# EAGLE board PSPS_AVNC_MITCH_2021-02-22 (EAGLE 9.6.2)
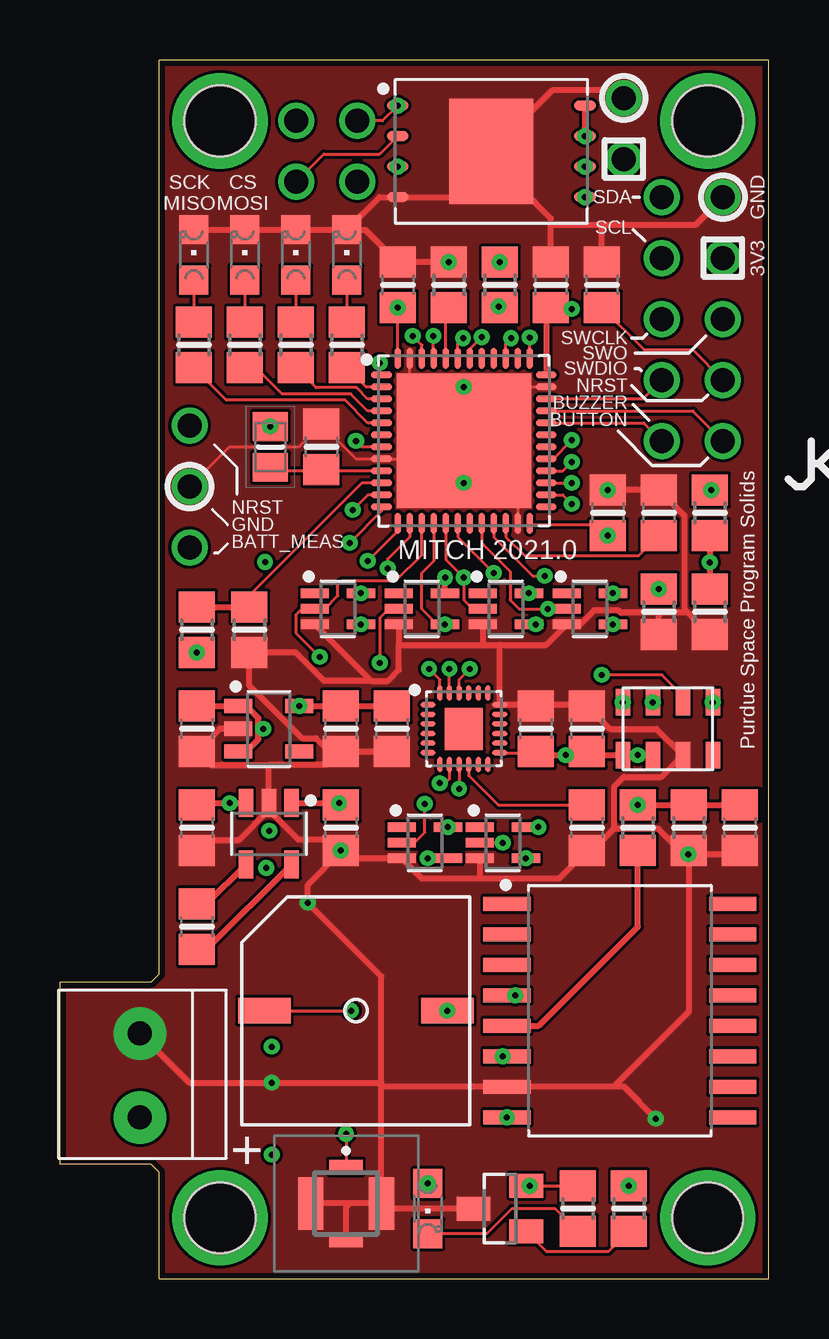
[diagram p0: board, top side]
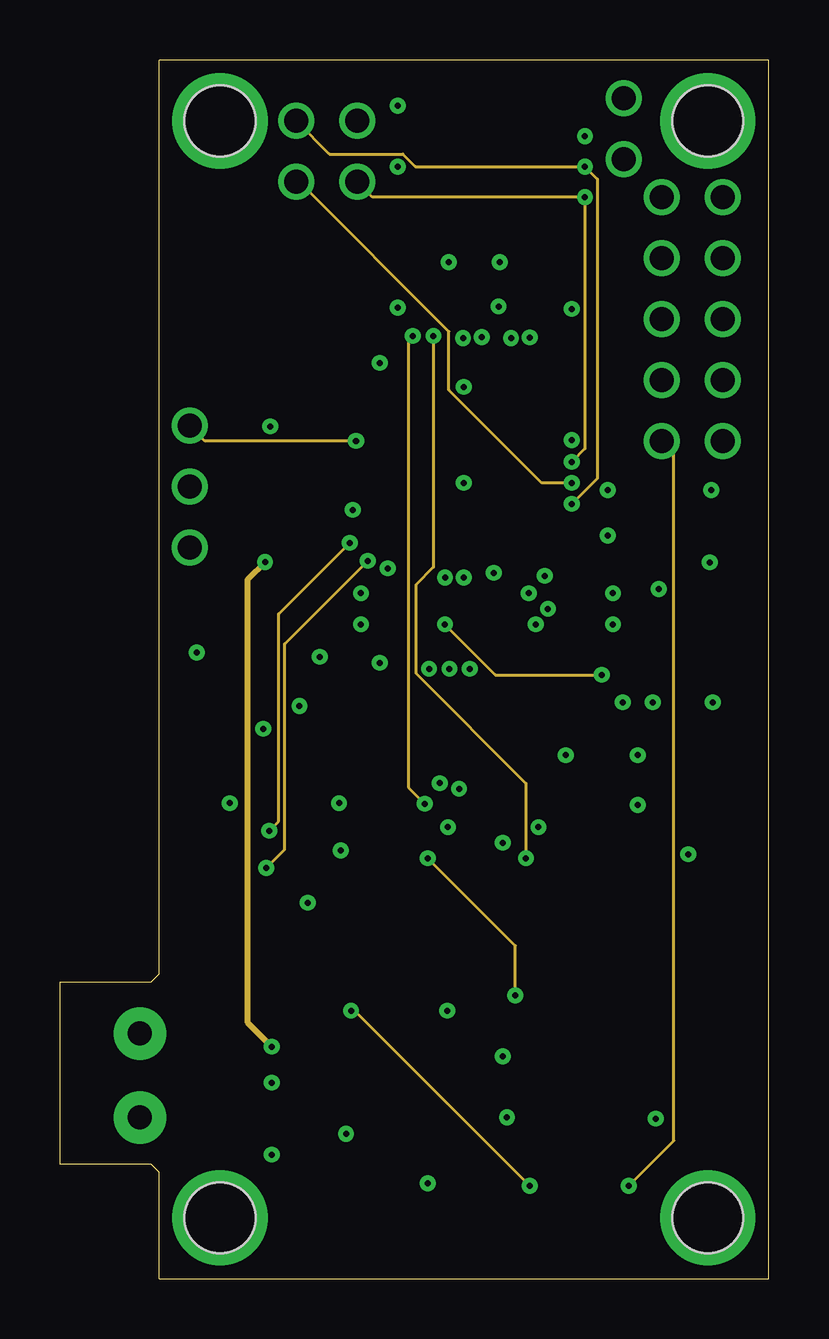
[diagram p1: board, inner layer Route2]
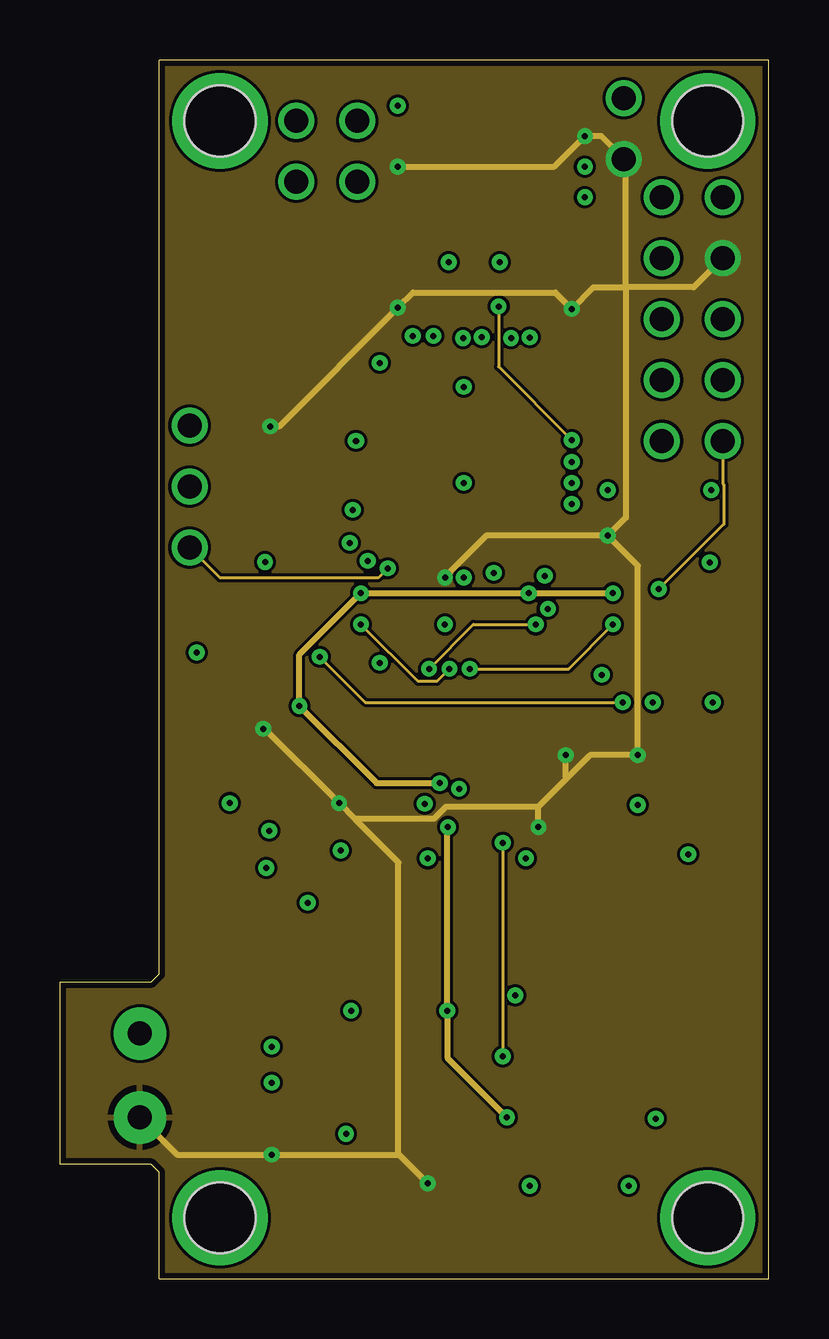
[diagram p2: board, inner layer Route15]
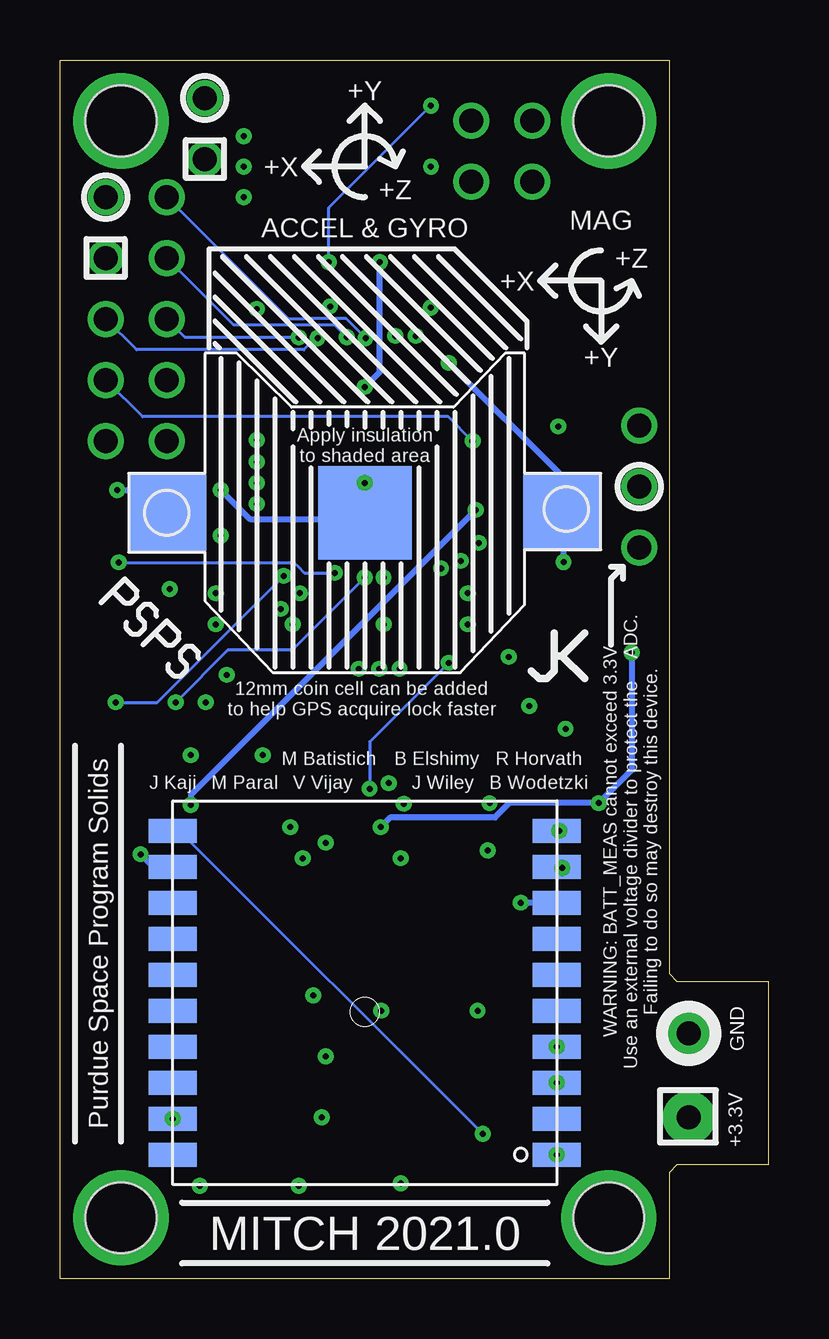
[diagram p3: board, bottom side, seen from below]

Size 29.53 x 50.8 mm. Coordinates in mm from the lower left corner, seen from the top.
Outline: 4.13,0 29.53,0 29.53,50.8 4.13,50.8 4.13,12.7 3.81,12.38 0,12.38 0,4.76 3.81,4.76 4.13,4.44 4.13,0
Copper layers (1+2*15+16): Top 0.035mm / dielectric 1.5mm / Route2 0.035mm / dielectric 0.15mm / Route15 0.035mm / dielectric 0.2mm / Bottom 0.035mm
Design rules "default *": minimum track width 5mil, minimum drill 0.25mm, track to track 5mil, track to pad 5mil, pad to pad 5mil, via to via 5mil, smd to smd 5mil, copper to edge 10mil, drill to drill 5mil, minimum pad ring 10mil, minimum via ring 8mil, stop-mask expansion 4mil, vias tented up to drill 0mil, thermal gap 10mil
Holes 2.95 mm at 6.67,2.54 26.99,2.54 26.99,48.26 6.67,48.26

## Footprints (pad centres in the part's own frame; a part is rotated, then mirrored left to right if it is on the bottom)
C0805 = smd 1.3 x 1.5: 1 -0.95,0; 2 0.95,0
BEADC2012X105N = smd 1.2 x 1.45: 1 -0.85,0; 2 0.85,0
A1JB = smd 0.6 x 1.4: 1 1.525,0; 3 -1.525,0 | smd 2.2 x 1.05: 2 0,1.475; 4 0,-1.475
1X2-3.5MM = drill 1 pad 2.184: 1 1.8,0; 2 -1.7,0
CHIPLED_0805 = smd 1.2 x 1.2: A 0,-1.05; C 0,1.05
R0805 = smd 1.3 x 1.5: 1 -0.95,0; 2 0.95,0
QFN50P700X700X50-49T560N = smd 0.86 x 0.27: 1 -3.435,2.75; 2 -3.435,2.25; 3 -3.435,1.75; 4 -3.435,1.25; 5 -3.435,0.75; 6 -3.435,0.25; 7 -3.435,-0.25; 8 -3.435,-0.75; 9 -3.435,-1.25; 10 -3.435,-1.75; 11 -3.435,-2.25; 12 -3.435,-2.75; 25 3.435,-2.75; 26 3.435,-2.25; 27 3.435,-1.75; 28 3.435,-1.25; 29 3.435,-0.75; 30 3.435,-0.25; 31 3.435,0.25; 32 3.435,0.75; 33 3.435,1.25; 34 3.435,1.75; 35 3.435,2.25; 36 3.435,2.75 | smd 0.27 x 0.86: 13 -2.75,-3.435; 14 -2.25,-3.435; 15 -1.75,-3.435; 16 -1.25,-3.435; 17 -0.75,-3.435; 18 -0.25,-3.435; 19 0.25,-3.435; 20 0.75,-3.435; 21 1.25,-3.435; 22 1.75,-3.435; 23 2.25,-3.435; 24 2.75,-3.435; 37 2.75,3.435; 38 2.25,3.435; 39 1.75,3.435; 40 1.25,3.435; 41 0.75,3.435; 42 0.25,3.435; 43 -0.25,3.435; 44 -0.75,3.435; 45 -1.25,3.435; 46 -1.75,3.435; 47 -2.25,3.435; 48 -2.75,3.435 | smd 5.6 x 5.6: 49 0,0
QFN40P300X300X105-25T159X175 = smd 0.635 x 0.203: 1 -1.496,1; 2 -1.496,0.6; 3 -1.496,0.2; 4 -1.496,-0.2; 5 -1.496,-0.6; 6 -1.496,-1; 13 1.496,-1; 14 1.496,-0.6; 15 1.496,-0.2; 16 1.496,0.2; 17 1.496,0.6; 18 1.496,1 | smd 0.203 x 0.635: 7 -1,-1.496; 8 -0.6,-1.496; 9 -0.2,-1.496; 10 0.2,-1.496; 11 0.6,-1.496; 12 1,-1.496; 19 1,1.496; 20 0.6,1.496; 21 0.2,1.496; 22 -0.2,1.496; 23 -0.6,1.496; 24 -1,1.496 | smd 1.59 x 1.75: 25 0,0
SOIC127P1041X355-16N = smd 1.973 x 0.589: 1 -4.705,4.445; 2 -4.705,3.175; 3 -4.705,1.905; 4 -4.705,0.635; 5 -4.705,-0.635; 6 -4.705,-1.905; 7 -4.705,-3.175; 8 -4.705,-4.445; 9 4.705,-4.445; 10 4.705,-3.175; 11 4.705,-1.905; 12 4.705,-0.635; 13 4.705,0.635; 14 4.705,1.905; 15 4.705,3.175; 16 4.705,4.445
SOT65P210X110-5 = smd 1.186 x 0.397: 1 -0.962,0.65; 2 -0.962,0; 3 -0.962,-0.65; 4 0.962,-0.65; 5 0.962,0.65
CR1220-SMD = smd 3.2 x 3.2: +$1 -8.2,0; +$2 8.2,0 | smd 3.9 x 3.9: - 0,0
SON127P800X600X80-9T350X440N = smd 0.911 x 0.42: 1 -3.901,1.905; 2 -3.901,0.635; 3 -3.901,-0.635; 4 -3.901,-1.905; 5 3.901,-1.905; 6 3.901,-0.635; 7 3.901,0.635; 8 3.901,1.905 | smd 3.5 x 4.4: 9 0,0
ASI09N27M-05Q = smd 2.184 x 1.067: V+ 3.81,0; V- -3.81,0
SOT95P280X145-5N = smd 1.165 x 0.597: 1 -1.275,0.95; 2 -1.275,0; 3 -1.275,-0.95; 4 1.275,-0.95; 5 1.275,0.95
SOT23 = smd 1 x 1.4: 1 -0.95,-1.1; 2 0.95,-1.1; 3 0,1.1
MS5607 = smd 1.1 x 0.6: P$1 -1.1,1.875; P$2 -1.1,0.625; P$3 -1.1,-0.625; P$4 -1.1,-1.875; P$5 1.1,-1.875; P$6 1.1,-0.625; P$7 1.1,0.625; P$8 1.1,1.875
FGPMMOPA6H = smd 2 x 1: 1PPS 8,-3.75; 3D-FIX -8,0.75; EXT_ANT 8,-6.75; GND@3 -8,3.75; GND@8 -8,-3.75; GND@12 8,-5.25; GND@19 8,5.25; NC@6 -8,-0.75; NC@7 -8,-2.25; NC@15 8,-0.75; NC@16 8,0.75; NC@17 8,2.25; NC@18 8,3.75; NC@20 8,6.75; NRESET -8,5.25; RTCM 8,-2.25; RX -8,-6.75; TX -8,-5.25; VBACKUP -8,2.25; VCC -8,6.75

## Placement (x,y rotation side)
C1-0C  4.7uF  [C0805]  24.95,31.92 90 top
C1-0S1  4.7uF  [C0805]  21.95,22.92 90 top
C1-0S2  4.7uF  [C0805]  11.7,18.8 270 top
C1-0S3  22uF  [C0805]  5.7,18.8 270 top
C1-0S4  0.1uF  [C0805]  5.7,14.67 270 top
C1-0S5  1uF  [C0805]  5.7,22.92 270 top
C1-0S6  100uF  [C0805]  11.7,22.92 270 top
C1-0S7  1nF  [C0805]  28.33,18.8 270 top
C1-1S  0.1uF  [C0805]  21.95,18.8 270 top
C2-0C  0.1uF  [C0805]  10.89,34.67 90 top
C2-1S  0.1uF  [C0805]  19.83,22.92 90 top
C3-0C  0.1uF  [C0805]  22.83,31.92 90 top
C3-1S  0.1uF  [C0805]  13.83,22.92 270 top
C4-0C  0.1uF  [C0805]  20.45,41.42 90 top
C5-0C  0.1uF  [C0805]  14.08,41.42 90 top
C5-0C1  0.1uF  [C0805]  22.58,41.42 90 top
FB1-0C  MMZ2012Y152B  [BEADC2012X105N]  8.77,34.67 90 top
J1  A-1JB  [A1JB]  11.92,3.13 90 top
J2  1X2-3.5MM  [1X2-3.5MM]  3.33,8.42 90 top
LED1  [CHIPLED_0805]  11.95,42.67 0 top
LED2  [CHIPLED_0805]  9.83,42.67 0 top
LED3  [CHIPLED_0805]  7.7,42.67 0 top
LED4  [CHIPLED_0805]  5.58,42.67 0 top
LED5  [CHIPLED_0805]  15.33,2.92 180 top
R1  [R0805]  23.7,2.92 270 top
R1-0C  10k  [R0805]  16.2,41.42 270 top
R1-C  TBD  [R0805]  11.95,38.92 90 top
R2  [R0805]  18.33,41.42 90 top
R2-C  TBD  [R0805]  9.83,38.92 90 top
R3  [R0805]  27.08,31.92 270 top
R3-C  TBD  [R0805]  7.7,38.92 90 top
R4  [R0805]  27.08,27.8 270 top
R4-C  TBD  [R0805]  5.58,38.92 90 top
R4-C1  TBD  [R0805]  21.58,2.92 90 top
R5  10k  [R0805]  24.08,18.8 270 top
R6  10k  [R0805]  26.2,18.8 90 top
R7  10k  [R0805]  7.89,27.05 90 top
R8  10k  [R0805]  5.7,27.05 270 top
R9  [R0805]  24.95,27.8 270 top
U0-C  STM32F411CEUX  [QFN50P700X700X50-49T560N]  16.83,34.92 0 top
U1-S  ICM-20948  [QFN40P300X300X105-25T159X175]  16.83,22.92 0 top
U2-S  MMA1211KEG  [SOIC127P1041X355-16N]  23.33,11.17 0 top
U11-S  SN74LV1T34  [SOT65P210X110-5]  22.08,27.92 0 top
U12-S  SN74LV1T34  [SOT65P210X110-5]  18.58,27.92 0 top
U13-S  SN74LV1T34  [SOT65P210X110-5]  11.58,27.92 0 top
U14-S  SN74LV1T34  [SOT65P210X110-5]  15.08,27.92 0 top
U14-S1  SN74LV1T34  [SOT65P210X110-5]  18.45,18.17 0 top
U14-S2  SN74LV1T34  [SOT65P210X110-5]  15.2,18.17 0 top
U$1  [CR1220-SMD]  16.83,31.92 0 bottom
U$2  TC58CVG2S0HRAIJ  [SON127P800X600X80-9T350X440N]  17.97,46.99 0 top
U$3  ASI09N27M-05Q  [ASI09N27M-05Q]  12.33,11.17 0 top
U$4  LTC1517ES5-5  [SOT95P280X145-5N]  8.7,18.55 270 top
U$5  TLV74118PDBVR  [SOT95P280X145-5N]  8.7,22.92 0 top
U$6  NPN_TRANSISTOR  [SOT23]  18.33,2.92 90 top
U$7  MS5607  [MS5607]  25.33,22.92 90 top
U$8  ULTIMATE_GPS  [FGPMMOPA6H]  16.83,11.92 180 bottom

## Library data of the parts
C1-0C C1-0S1-C1-0S7 C1-1S C2-0C C2-1S C3-0C C3-1S C4-0C C5-0C C5-0C1 R1 R1-0C R1-C R2 R2-C R3 R3-C R4 R4-C R4-C1 R5-R9 = resistor
FB1-0C = Computer2; DESCRIPTION: Ferrite bead SMD 1500Ohm 500mA TDK Ferrite Bead (Chip Bead), 2 x 1.25 x 0.85mm (0805); HEIGHT: 1.05mm; MANUFACTURER_NAME: TDK; MANUFACTURER_PART_NUMBER: MMZ2012Y152B; MOUSER_PART_NUMBER: 810-MMZ2012Y152B; MOUSER_PRICE-STOCK: https://www.mouser.com/Search/Refine.aspx?Keyword=810-MMZ2012Y152B
J1 = SamacSys_Parts; DESCRIPTION: AMC Straight PCB Jack, Surface Mount; HEIGHT: 1.05mm; MANUFACTURER_NAME: Amphenol; MANUFACTURER_PART_NUMBER: A-1JB; MOUSER_PART_NUMBER: 523-A-1JB; MOUSER_PRICE-STOCK: https://www.mouser.com/Search/Refine.aspx?Keyword=523-A-1JB
J2 LED1-LED5 U$1 = adafruit
U0-C U1-S U2-S U11-S U12-S U13-S U14-S U14-S1 U14-S2 U$2-U$8 = Computer2

## Nets
1V8: C1-0S6.1 C3-1S.1 U1-S.8 U11-S.5 U12-S.5 U13-S.5 U$5.5
3V3: C1-0S1.1 C1-0S2.1 C1-0S5.1 C2-1S.1 C3-0C.1 C4-0C.1 C5-0C.1 FB1-0C.2 J2.2 LED5.A U0-C.24 U0-C.36 U0-C.48 U1-S.13 U14-S1.5 U14-S.5 U$2.3 U$2.7 U$2.8 U$4.1 U$5.1 U$5.3 U$7.P$1 U$7.P$2 U$8.VCC
5V: C1-0S3.1 R8.2 U2-S.8 U14-S2.5 U$3.V+ U$4.3
ALA_MEAS: C1-0S7.1 R5.1 R6.2 U0-C.11
ALA_REF: R7.2 R8.1 U0-C.10
ALA_ST: U0-C.46 U14-S2.2
ALA_STATUS: U0-C.45 U14-S1.4
BATT_MEAS: U0-C.14
BOOT0: R1-0C.2 U0-C.44
BUTTON_IN: R9.1 U0-C.33
BUZZER_OUT: R1.1 U0-C.32
CS-1V8: U1-S.22 U11-S.4
CS_BMP: U0-C.21 U$7.P$4 U$7.P$5
CS_IMU: U0-C.20 U11-S.2
CS_STORAGE: R2.1 U0-C.29
CS_STORAGE-VIA: R2.2 U$2.1
GND: C1-0C.2 C1-0S1.2 C1-0S2.2 C1-0S3.2 C1-0S5.2 C1-0S6.2 C1-0S7.2 C1-1S.2 C2-0C.2 C2-1S.2 C3-0C.2 C3-1S.2 C4-0C.2 C5-0C1.2 C5-0C.2 J1.2 J1.3 J1.4 J2.1 LED1.C LED2.C LED3.C LED4.C R1-0C.1 R4.2 R6.1 R7.1 R9.2 U0-C.8 U0-C.23 U0-C.35 U0-C.47 U0-C.49 U1-S.18 U2-S.7 U11-S.3 U12-S.3 U13-S.3 U14-S1.3 U14-S2.3 U14-S.3 U$1.- U$2.4 U$2.9 U$4.2 U$5.2 U$6.3 U$7.P$3 U$8.GND@3 U$8.GND@8 U$8.GND@12 U$8.GND@19
I2C_SCL: U0-C.42
I2C_SDA: U0-C.43
LD1: R4-C.1 U0-C.5
LD2: R3-C.1 U0-C.4
LD3: R2-C.1 U0-C.3
LD4: R1-C.1 U0-C.2
MISO-1V8: U1-S.9 U14-S.2
MOSI-1V8: U1-S.24 U12-S.4
N$1: R1.2 U$6.1
N$2: LED4.A R4-C.2
N$3: LED3.A R3-C.2
N$4: LED2.A R2-C.2
N$5: LED1.A R1-C.2
N$10: R3.1 U$1.+$1
N$11: R4-C1.2 U$3.V- U$6.2
N$12: C1-0S4.1 U$4.4
N$13: C1-0S4.2 U$4.5
N$14: LED5.C R4-C1.1
N$15: J1.1 U$8.EXT_ANT
N$16: R5.2 U2-S.5
NRST: C5-0C1.1 U0-C.7
SCK-1V8: U1-S.23 U13-S.4
SPI1_MISO: U0-C.16 U14-S.4 U$7.P$6
SPI1_MOSI: U0-C.17 U12-S.2 U$7.P$7
SPI1_SCK: U0-C.15 U13-S.2 U$7.P$8
SPI2_MISO: U0-C.27 U$2.2
SPI2_MOSI: U0-C.28 U$2.5
SPI2_SCK: U0-C.26 U$2.6
ST-5V: U2-S.4 U14-S2.4
STATUS-5V: U2-S.6 U14-S1.2
SWCLK: U0-C.37
SWDIO: U0-C.34
SWO: U0-C.39
U1S-REGOUT: C1-1S.1 U1-S.10
USART2_RX: U0-C.13 U$8.TX
USART2_TX: U0-C.12 U$8.RX
VBAT: U0-C.1 U$1.+$2 U$8.VBACKUP
VBAT_MEAS: R3.2 R4.1 U0-C.18
VCAP: C1-0C.1 U0-C.22
VREF+: C2-0C.1 FB1-0C.1 U0-C.9

## Tracks (layer width: path | path; a pad name or v marks a point on that pad's centre or on a via)
1V8  (via drill 0.25)
  Top 0.127: U12-S.5 v19.53,28.57 | U1-S.8 16.23,20.82 16.06,20.66 v15.83,20.66
  Top 0.254: U$5.5 C1-0S6.1 C3-1S.1
  Route15 0.254: U11-S.5 v19.53,28.57 U13-S.5 9.98,26.01 U$5.5 13.2,20.66 v15.83,20.66
  other vias: 23.04,28.57 12.54,28.57 9.98,23.87
3V3  (via drill 0.25, 1)
  Top 0.127: 19.58,31.17 U0-C.24 19.64,31.42 22.38,31.42 C3-0C.1 | U0-C.48 14.06,38.38 14.08,38.4 C5-0C.1 | 20.63,37.67 U0-C.36 | v24.08,21.82 U$7.P$1 22.1,21.82 | 22.1,21.82 C1-0S1.1 | U1-S.13 19.83,21.92 | 22.08,21.82 22.1,21.82
  Top 0.254: U$2.8 U$2.7 | U$5.3 7.75,21.97 8.26,22.49 8.26,22.92 | 8.26,22.92 8.26,23.36 7.75,23.87 U$5.1 C1-0S5.1 | U$4.1 v11.63,19.82 C1-0S2.1 | U$7.P$2 v24.08,21.82 22.08,21.82 v21.08,21.82 19.98,21.82 C2-1S.1 19.83,21.92 | U14-S.5 16.04,29.17 v16.04,29.22 | U14-S1.5 v19.93,18.82 | v8.46,22.92 8.26,22.92 | U0-C.36 20.26,40.28 C4-0C.1 20.5,40.42 v21.33,40.42
  Route15 0.254: 14.13,5.17 14.1,5.2 14.1,17.35 12.3,19.15 | 14.13,5.17 LED5.A | 14.13,5.17 U$8.VCC 4.88,5.17 J2.2 | 12.3,19.15 v11.63,19.82 8.53,22.92 v8.46,22.92 | v27.62,42.54 26.4,41.32 23.58,41.32 | 23.58,41.32 22.22,41.32 v21.33,40.42 | 23.58,41.32 23.58,41.27 23.58,31.72 C3-0C.1 | v16.04,29.22 16.25,29.42 16.25,29.46 17.76,30.97 C3-0C.1 | C3-0C.1 24.08,29.72 v24.08,21.82 22.08,21.82 21.13,20.87 | v19.93,18.82 19.93,19.67 | 19.93,19.67 16.08,19.67 15.58,19.17 12.33,19.17 12.3,19.15 | 21.13,20.87 19.93,19.67 | FB1-0C.2 9.13,35.52 C5-0C.1 14.71,41.11 20.64,41.11 v21.33,40.42 | U$2.3 20.6,46.35 U$2.7 22.54,47.62 v23.5,46.67 23.58,46.59 23.58,41.32 | 21.13,20.87 21.08,20.92 v21.08,21.82 | v21.33,40.42 21.45,40.55
  other vias: 15.33,3.97 8.83,5.17 22.83,30.97 14.08,40.47 14.07,46.35 21.87,47.62 8.77,35.52
  pour Route15: 4.33,50.67 4.33,12.67 3.83,12.17 0.2,12.17 0.2,4.92 3.83,4.92 4.33,4.42 4.33,0.17 29.33,0.17 29.33,50.67
5V  (via drill 0.25)
  Top 0.254: C1-0S3.1 5.78,19.82 v7.08,19.82 U$4.3 | 17.77,6.73 U2-S.8 | U$3.V+ 15.39,11.17 15.2,11.36
  Route15 0.254: U2-S.8 16.14,9.21 U$3.V+ 16.14,18.8 U14-S2.5
  Bottom 0.254: U14-S2.5 15.77,19.22 11.41,19.22 10.8,19.82 v7.08,19.82 5.7,21.2 R8.2
  other vias: 16.16,18.82 18.62,6.73 16.14,11.17 5.7,26.1
ALA_MEAS  (via drill 0.25)
  Top 0.127: U0-C.11 12.83,32.67 v12.2,32.05
  Top 0.254: R5.1 R6.2 C1-0S7.1
  Bottom 0.254: v12.2,32.05 24.08,20.17 R5.1
  other vias: 24.08,19.75
ALA_REF
  Top 0.127: U0-C.10 12.58,33.17 7.89,28.49 R7.2
  Top 0.254: R8.1 R7.2
ALA_ST  (via drill 0.25)
  Top 0.127: U0-C.46 15.08,38.92 v14.7,39.3 | 14.74,18.17 U14-S2.2 14.77,18.17 15.2,18.61 v15.2,19.8
  Route2 0.127: v15.2,19.8 14.52,20.49 14.52,39.11 v14.7,39.3
ALA_STATUS  (via drill 0.25)
  Top 0.127: U0-C.45 15.56,38.38 v15.56,39.3
  Route2 0.127: v15.56,39.3 15.56,29.66 14.83,28.92 14.83,25.24 19.41,20.65 U14-S1.4
  other vias: 19.41,17.52
BATT_MEAS  (via drill 0.25, 1)
  Top 0.127: U0-C.14 14.58,30.92 13.65,30 v13.65,29.61
  Route15 0.127: v13.65,29.61 13.25,29.21 7.94,29.21 6.67,29.21 v5.4,30.48
BOOT0
  Top 0.127: R1-0C.2 16.08,40.35 U0-C.44
BUTTON_IN  (via drill 0.25, 1)
  Top 0.127: v27.62,34.92 26.37,36.17 U0-C.33
  Route15 0.127: v27.62,34.92 27.62,33.13 27.66,33.09 27.66,31.46 R9.1
  other vias: 24.95,28.75
BUZZER_OUT  (via drill 0.25, 1)
  Top 0.127: v25.08,34.92 24.33,35.67 U0-C.32
  Route2 0.127: R1.1 25.58,5.75 25.58,34.43 v25.08,34.92
  other vias: 23.7,3.87
CS-1V8  (via drill 0.25)
  Top 0.127: U1-S.22 16.63,24.97 v17.08,25.42
  Route15 0.127: v17.08,25.42 21.19,25.42 U11-S.4
  other vias: 23.04,27.27
CS_BMP  (via drill 0.25)
  Top 0.127: U0-C.21 18.08,30.92 19.7,29.3 v20.2,29.3 | U$7.P$4 U$7.P$5
  Bottom 0.127: U$7.P$5 25.48,24.02 v20.2,29.3
  other vias: 27.2,24.02
CS_IMU  (via drill 0.25)
  Top 0.127: U11-S.2 v20.33,27.92 19.13,27.92 18.76,28.3 18.76,29.48 17.58,30.66 U0-C.20
CS_STORAGE  (via drill 0.25)
  Top 0.127: U0-C.29 20.54,34.17 v21.33,34.96 | v18.28,40.53
  Top 0.254: R2.1 v18.28,40.53
  Route15 0.127: v18.28,40.53 18.28,38.01 v21.33,34.96
CS_STORAGE-VIA  (via drill 0.25, 1)
  Top 0.127: U$2.1 13.43,48.26 v12.38,48.26
  Bottom 0.127: R2.2 18.33,44.64 U$2.1
  other vias: 18.33,42.38 14.07,48.89
GND  (via drill 0.25, 1)
  Top 0.127: 10.98,27.27 U13-S.3 | 18.32,23.99 U1-S.18 18.58,23.92 19.58,23.92 19.78,23.92 19.88,23.92 | 21.55,27.27 U11-S.3 | U0-C.23 19.08,32.67 U0-C.49 | U0-C.49 16.08,34.17 U0-C.8 12.34,34.17 C2-0C.2 9.94,34.67 7.05,34.67 v5.4,33.02 | U0-C.49 14.58,37.17 U0-C.47 | U0-C.35 18.08,37.17 16.83,35.92 U0-C.49 | C1-0S1.2 C2-1S.2 | v16.83,33.17 U0-C.49 | 5.86,22.14 C1-0S5.2 | 11.98,17.57 11.73,17.82 C1-0S2.2 | U14-S1.3
  Top 0.254: 18.32,26.42 20.27,26.42 U11-S.3 21.68,27.27 22.26,27.86 23.28,27.86 23.38,27.76 25.08,27.76 | 18.32,23.99 18.32,26.42 | LED4.C LED3.C LED2.C LED1.C | C3-0C.2 C1-0C.2 26.02,31.81 26.02,27.91 26.17,27.76 | 17.96,45.02 17.96,45.43 | 17.96,45.43 17.97,46.67 | 17.97,46.67 U$2.9 20.51,49.53 23.18,49.53 v23.5,49.21 | U14-S.3 14.12,26.42 | 14.12,26.42 17.58,26.42 | 17.58,26.42 18.32,26.42 | U13-S.3 12.97,24.92 | 14.12,26.42 14.12,25.39 13.65,24.92 12.97,24.92 | 19.58,23.92 21.9,23.92 C1-0S1.2 22.9,22.92 24.85,22.92 U$7.P$3 25.05,20.92 23.49,20.92 23.07,20.5 23.07,18.76 23.08,18.75 | C2-1S.2 19.88,23.92 | 19.78,23.92 18.58,23.92 | 26.17,27.76 R4.2 | C4-0C.2 20.45,43.92 | 20.45,43.92 20.45,44.19 19.27,45.37 | 19.27,45.37 17.97,46.67 | R1-0C.1 C5-0C.2 12.73,43.72 LED1.C | 18.99,45.08 19.27,45.37 | U12-S.3 17.62,26.46 17.58,26.42 | v27.62,45.08 26.46,43.92 22.58,43.92 | 22.58,43.92 20.45,43.92 | C1-0S5.2 6.25,21.42 6.74,21.42 8.7,21.42 | C1-0S6.2 C3-1S.2 | C1-0S2.2 11.25,18.3 9.94,18.3 8.7,19.53 | 8.7,19.53 U$4.2 8.7,21.42 | C1-0S3.2 6.15,18.3 7.47,18.3 8.7,19.53 | C1-0S6.2 11.15,21.42 8.7,21.42 | 13.08,3.13 J1.4 13.39,8 | 13.08,3.13 12.08,3.13 | 12.08,3.13 J1.2 | J1.3 11.92,2.97 12.08,3.13 | U$6.3 13.29,2.92 13.08,3.13 | 13.39,8 13.39,8.17 | 13.39,8.17 13.39,12.61 v10.33,15.67 10.33,16.42 11.73,17.82 | 13.39,8 U2-S.7 23.08,8 | U$8.GND@19 23.5,8 23.08,8 | 13.39,8.17 U$8.GND@3 5.38,8.17 J2.1 | C1-0S6.2 11.22,21.97 10.67,22.53 10.09,22.53 7.89,24.72 R7.1 9.83,26.1 11,24.92 12.97,24.92 | U$5.2 6.65,22.92 5.86,22.14 | U0-C.49 v16.83,37.17 | 17.96,45.43 17.62,45.08 U$2.4 13.31,45.08 LED1.C | 22.32,17.85 C1-1S.2 | C1-0S7.2 28.17,17.69 v26.17,17.69
  Top 0.254: v26.17,17.69 25.99,17.69 24.93,18.75 23.08,18.75 | v26.17,17.69 26.17,17.82 R6.1 26.2,11.12 23.08,8 | C1-1S.2 22.17,17.85 23.08,18.75 | C1-1S.2 20.78,16.67 17.49,16.67 | 17.49,16.67 15.09,16.67 U14-S2.3 12.03,17.52 11.98,17.57 | U14-S1.3 17.49,16.67 | C5-0C1.2 22.58,43.92 | 26.17,27.76 25.08,27.76 | R9.2 24.95,27.64 25.08,27.76
  Bottom 0.127: U$1.- v16.83,33.17
  Bottom 0.254: 16.08,32.67 U$1.- 16.58,31.92 16.33,31.67 21.63,31.67 C3-0C.2 | U$8.GND@8 v10.33,15.67 | v16.83,37.17 16.2,37.8 R1-0C.1 | v26.17,17.69 25.65,17.17 U$8.GND@12
  other vias: 11.7,17.85 24.83,6.67 8.83,8.17 22.83,32.88 22.83,32.88 16.2,42.38
  pour Top (no thermals): 4.33,50.67 4.33,12.67 3.83,12.17 0.2,12.17 0.2,4.92 3.83,4.92 4.33,4.42 4.33,0.17 29.33,0.17 29.33,50.67
I2C_SCL  (via drill 0.25, 1)
  Top 0.127: U0-C.42 17.08,38.74 v17.58,39.24
  Bottom 0.127: v17.58,39.24 18.09,39.76 22.29,39.76 23.39,40.86 v25.08,42.54
I2C_SDA  (via drill 0.25, 1)
  Top 0.127: U0-C.43 16.58,38.99 v16.79,39.21
  Bottom 0.127: v16.79,39.21 17.6,40.01 19.37,40.01 20.01,40.01 v25.08,45.08
LD1
  Top 0.127: U0-C.5 12.83,35.67 11.88,36.63 6.93,36.63 R4-C.1
LD2
  Top 0.127: R3-C.1 8.16,37.97 9.25,36.88 12.12,36.88 12.83,36.17 U0-C.4
LD3
  Top 0.127: R2-C.1 10.67,37.13 12.37,37.13 12.83,36.67 U0-C.3
LD4
  Top 0.127: U0-C.2 12.75,37.17 R1-C.1
MISO-1V8  (via drill 0.25)
  Top 0.127: U14-S.2 13.7,27.92 13.33,27.55 v13.33,25.67 | U1-S.9 v16.63,20.42
  Bottom 0.127: v13.33,25.67 16.63,22.37 v16.63,20.42
MOSI-1V8  (via drill 0.25)
  Top 0.127: U1-S.24 15.83,24.97 v15.38,25.42 | U12-S.4 v19.83,27.27
  Route15 0.127: v15.38,25.42 17.23,27.27 v19.83,27.27
N$1
  Top 0.127: U$6.1 20.27,1.13 22.86,1.13 R1.2
N$2
  Top 0.127: LED4.A R4-C.2
N$3
  Top 0.127: LED3.A R3-C.2
N$4
  Top 0.127: LED2.A R2-C.2
N$5
  Top 0.127: LED1.A R1-C.2
N$6  (via drill 2.95)
  other vias: 26.99,48.26
N$7  (via drill 2.95)
  other vias: 6.67,48.26
N$8  (via drill 2.95)
  other vias: 6.67,2.54
N$9  (via drill 2.95)
  other vias: 26.99,2.54
N$10  (via drill 0.25)
  Top 0.127: R3.1 v27.14,32.88
  Bottom 0.254: v27.14,32.88 25.78,32.88 25.03,32.12 U$1.+$1
N$11  (via drill 0.25)
  Top 0.127: v19.58,3.87 R4-C1.2 | U$3.V- v12.13,11.17
  Top 0.254: U$6.2 v19.58,3.87
  Route2 0.127: v12.13,11.17 12.28,11.17 v19.58,3.87
N$12
  Top 0.254: U$4.4 6.1,15.62 C1-0S4.1
N$13
  Top 0.254: U$4.5 6.1,13.72 C1-0S4.2
N$14
  Top 0.127: R4-C1.1 20.63,2.92 18.83,2.92 17.78,1.88 LED5.C
N$15  (via drill 0.25)
  Top 0.127: v11.92,6.03 J1.1
  Bottom 0.127: 24.58,18.67 U$8.EXT_ANT 24.56,18.67 v11.92,6.03
N$16
  Top 0.254: U2-S.5 19.94,10.54 24.08,14.67 R5.2
NRST  (via drill 0.25, 1)
  Top 0.127: U0-C.7 12.58,34.67 v12.33,34.92 | v27.62,37.46 26.37,38.72 24.34,38.72 C5-0C1.1
  Route2 0.127: v12.34,34.92 v12.33,34.92 6.03,34.92 v5.4,35.56
  Bottom 0.127: v12.34,34.92 13.35,35.93 26.09,35.93 v27.62,37.46
SCK-1V8  (via drill 0.25)
  Top 0.127: U1-S.23 v16.23,25.42
  Route15 0.127: U13-S.4 14.91,24.91 15.71,24.91 v16.23,25.42
  other vias: 12.54,27.27
SPI1_MISO  (via drill 0.25)
  Top 0.127: U0-C.16 15.58,29.92 15.08,29.42 15.08,27.92 15.73,27.27 | v22.58,25.17 25.08,25.17 25.95,24.3 | U14-S.4 16.06,27.3 16.52,27.3
  Top 0.254: U$7.P$6 25.95,24.3 | U14-S.4 15.73,27.27
  Route2 0.127: U14-S.4 18.14,25.17 v22.58,25.17
  other vias: 16.04,27.27
SPI1_MOSI  (via drill 0.25)
  Top 0.127: U12-S.2 17.2,27.92 16.83,28.3 v16.83,29.22 16.08,29.97 U0-C.17
  Bottom 0.127: U$7.P$7 22.53,26.2 19.85,26.2 v16.83,29.22
  other vias: 24.7,24.02
SPI1_SCK  (via drill 0.25)
  Top 0.127: U0-C.15 15.08,30.17 14,29.09 11.75,29.09 11.58,28.92 11.58,28.48 11.03,27.92 U13-S.2 10.08,27.92 9.83,27.67 9.83,26.92 v10.83,25.92
  Route15 0.127: v10.83,25.92 12.73,24.02 U$7.P$8
  other vias: 23.45,24.02
SPI2_MISO  (via drill 0.25, 1)
  Top 0.127: U0-C.27 v21.33,33.17 | v9.84,45.72 11,46.87 13.32,46.87 U$2.2
  Route2 0.127: v21.33,33.17 20.08,33.17 16.2,37.05 16.2,39.48 9.97,45.72 v9.84,45.72
SPI2_MOSI  (via drill 0.25, 1)
  Top 0.127: U0-C.28 20.95,33.67 v21.33,34.05
  Route2 0.127: v12.38,45.72 13.02,45.08 U$2.5 21.87,34.59 v21.33,34.05
  other vias: 21.87,45.08
SPI2_SCK  (via drill 0.25, 1)
  Top 0.127: U0-C.26 20.95,32.67 v21.33,32.3
  Route2 0.127: v21.33,32.3 22.39,33.36 22.39,45.84 U$2.6 14.8,46.35 14.28,46.87 11.23,46.87 9.88,48.22
  Route2 0.254: 9.88,48.22 v9.84,48.26
  other vias: 21.87,46.35
ST-5V  (via drill 0.25)
  Top 0.127: 18.34,11.81 U2-S.4 v18.97,11.81 | U14-S2.4 v15.33,17.52
  Route2 0.127: v18.97,11.81 18.97,13.88 v15.33,17.52
STATUS-5V  (via drill 0.25)
  Top 0.127: U14-S1.2 v18.45,18.17 | U2-S.6 v18.45,9.27
  Route15 0.127: v18.45,18.17 v18.45,9.27
SWCLK  (via drill 0.25, 1)
  Top 0.127: 19.64,38.36 U0-C.37 v19.58,39.24
  Bottom 0.127: v25.08,40 24.31,39.24 v19.58,39.24
SWDIO  (via drill 1)
  Top 0.127: 20.58,36.67 U0-C.34 20.28,36.69 21.14,36.69 24.31,36.69 v25.08,37.46
SWO  (via drill 0.25, 1)
  Top 0.127: U0-C.39 18.58,38.99 v18.79,39.21
  Bottom 0.127: v18.79,39.21 18.88,39.21 19.36,38.72 26.34,38.72 v27.62,40
U1S-REGOUT
  Top 0.127: U1-S.10 17.03,20.97 18.25,19.75 C1-1S.1
USART2_RX  (via drill 0.25)
  Top 0.127: U0-C.13 14.08,31.17 v12.83,29.92
  Route2 0.127: v12.83,29.92 9.36,26.46 9.36,17.89 v8.6,17.12
  Bottom 0.254: U$8.TX 8.58,17.17 v8.6,17.12
USART2_TX  (via drill 0.25)
  Top 0.127: U0-C.12 13.39,31.99 v12.08,30.67
  Route2 0.127: v8.72,18.67 9.11,19.06 9.11,27.71 v12.08,30.67
  Bottom 0.254: U$8.RX v8.72,18.67
VBAT  (via drill 0.25)
  Top 0.127: U0-C.1 13.33,37.74 v13.33,38.17
  Route2 0.254: U$8.VBACKUP 7.83,10.67 7.83,29.16 v8.54,29.87
  Bottom 0.254: v13.33,38.17 8.63,33.47 U$1.+$2 8.54,31.84 v8.54,29.87
  other vias: 8.83,9.67
VBAT_MEAS  (via drill 0.25)
  Top 0.127: v18.08,29.42 16.58,30.92 U0-C.18
  Top 0.254: R4.1 v27.08,29.86 R3.2
  Bottom 0.127: v18.08,29.42 19.34,29.42 19.59,29.67 19.78,29.86 v27.08,29.86
VCAP
  Top 0.127: 18.58,31.17 U0-C.22 18.58,30.92 19.37,30.13 24.11,30.13 C1-0C.1
VREF+
  Top 0.127: U0-C.9 10.94,33.67 C2-0C.1 10.89,33.67 8.77,33.67 FB1-0C.1

## Text on the board
tNames: SCK | CS | MISO | MOSI | SDA | GND | SCL | 3V3 | SWCLK | SWO | SWDIO | BUZZER | NRST | BUTTON | GND | NRST | BATT_MEAS | MITCH 2021.0 | Purdue Space Program Solids | +
bNames: +Y | +X | +Z | MAG | ACCEL & GYRO | +Z | +X | +Y | Apply insulation / to shaded area | 12mm coin cell can be added / to help GPS acquire lock faster | R Horvath | B Elshimy | M Batistich | B Wodetzki | J Wiley | V Vijay | M Paral | J Kaji | WARNING: BATT_MEAS cannot exceed 3.3V / Use an external voltage divider to protect the ADC. / Failing to do so may destroy this device. | Purdue Space Program Solids | GND | +3.3V | MITCH 2021.0